# Altium PCB AudioMonitor_PCB.PcbDoc
Units mm, origin at the board's own origin, x right, y up, seen from the top; angles counter-clockwise.
Board outline 40.25 x 52.75 mm, 2 copper layers (Top Layer, Bottom Layer); 33 components, 18 nets, 74 pads, 12 vias.
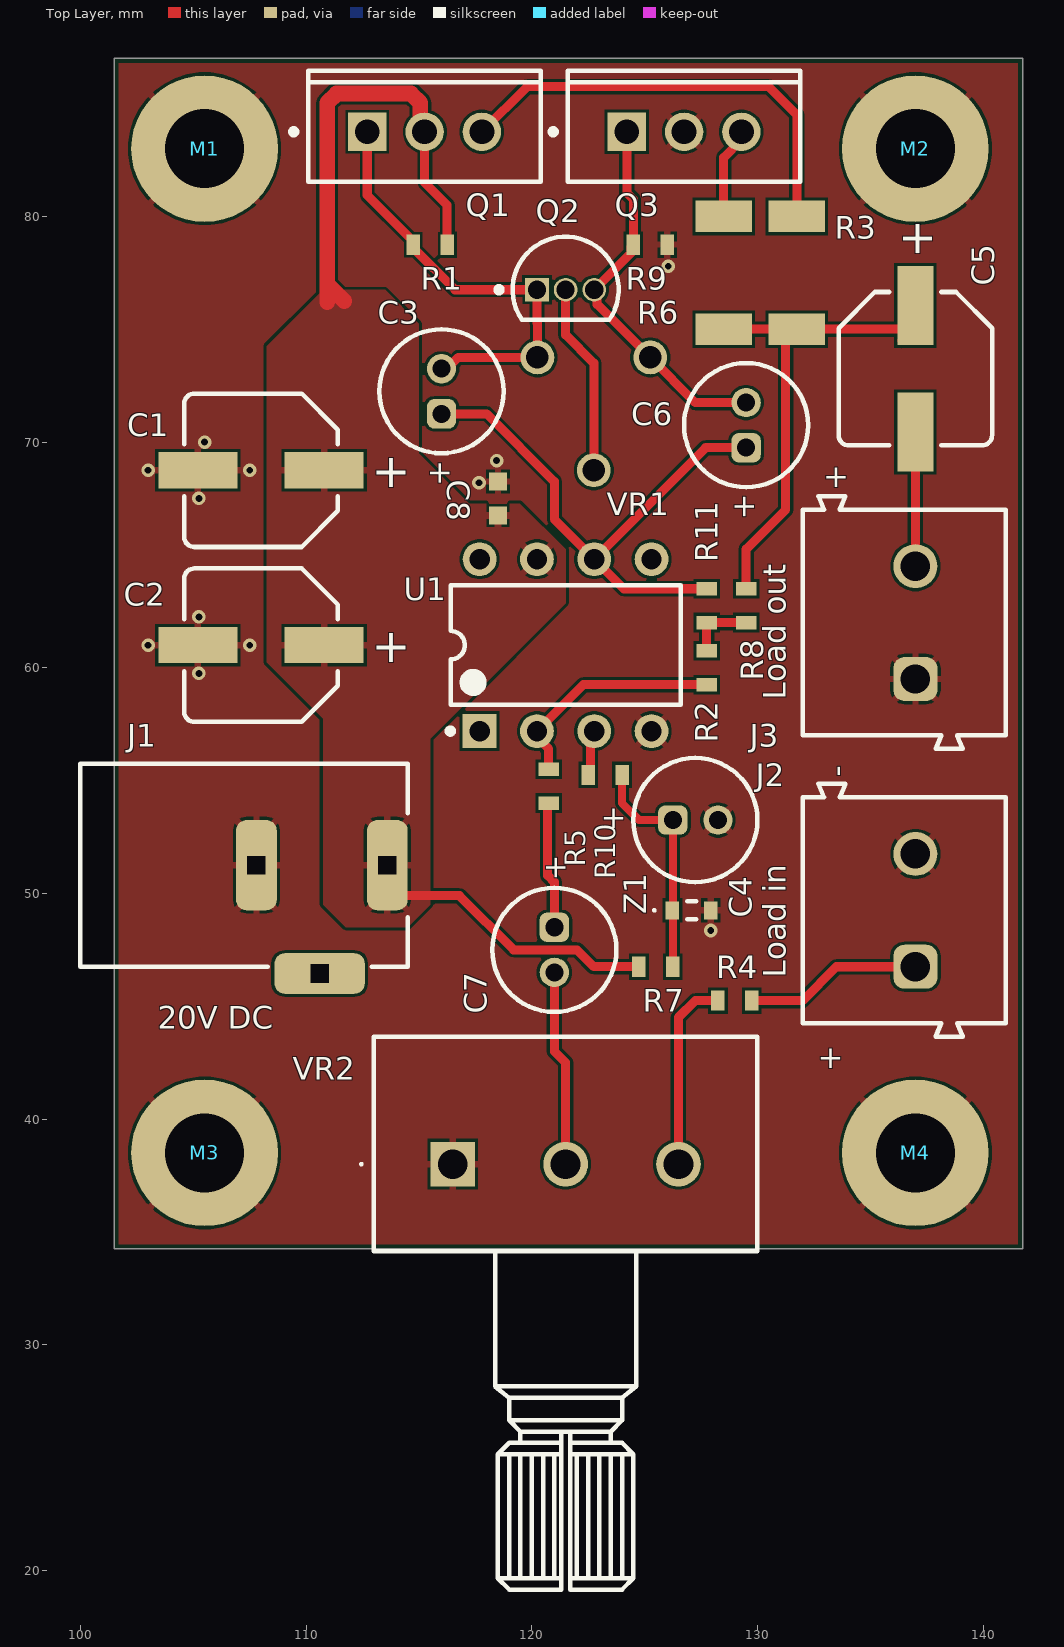
[diagram p0: Top Layer view]
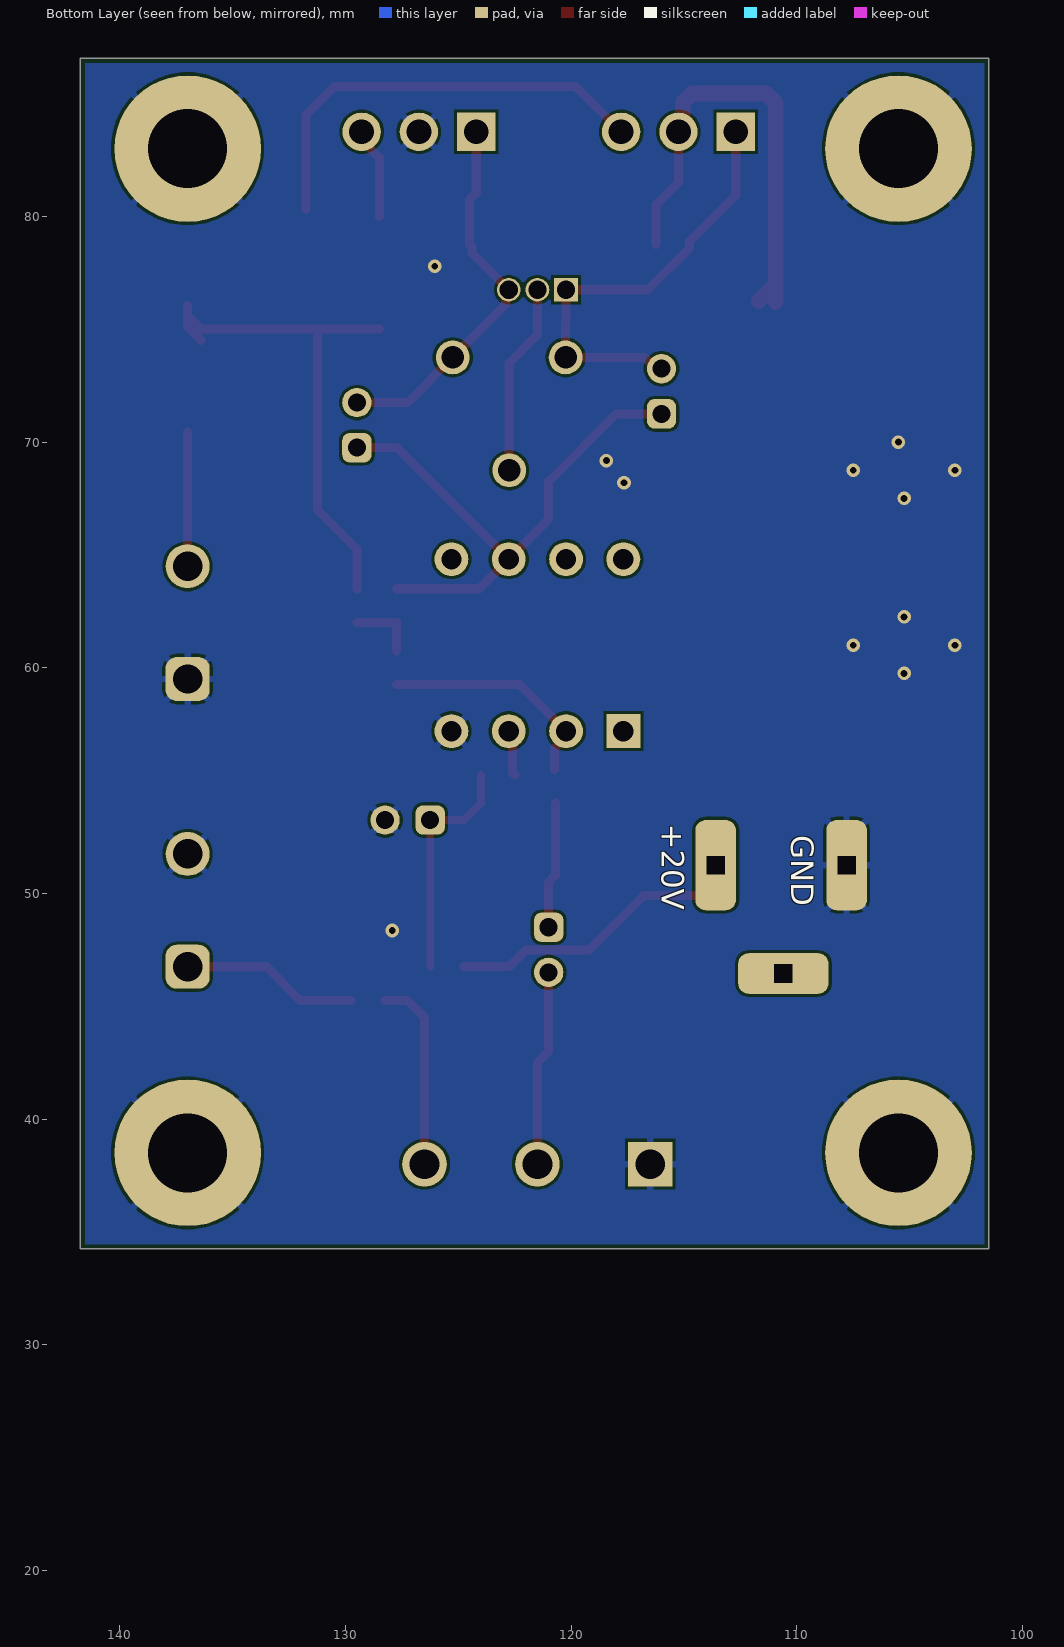
[diagram p1: Bottom Layer view, seen from below]
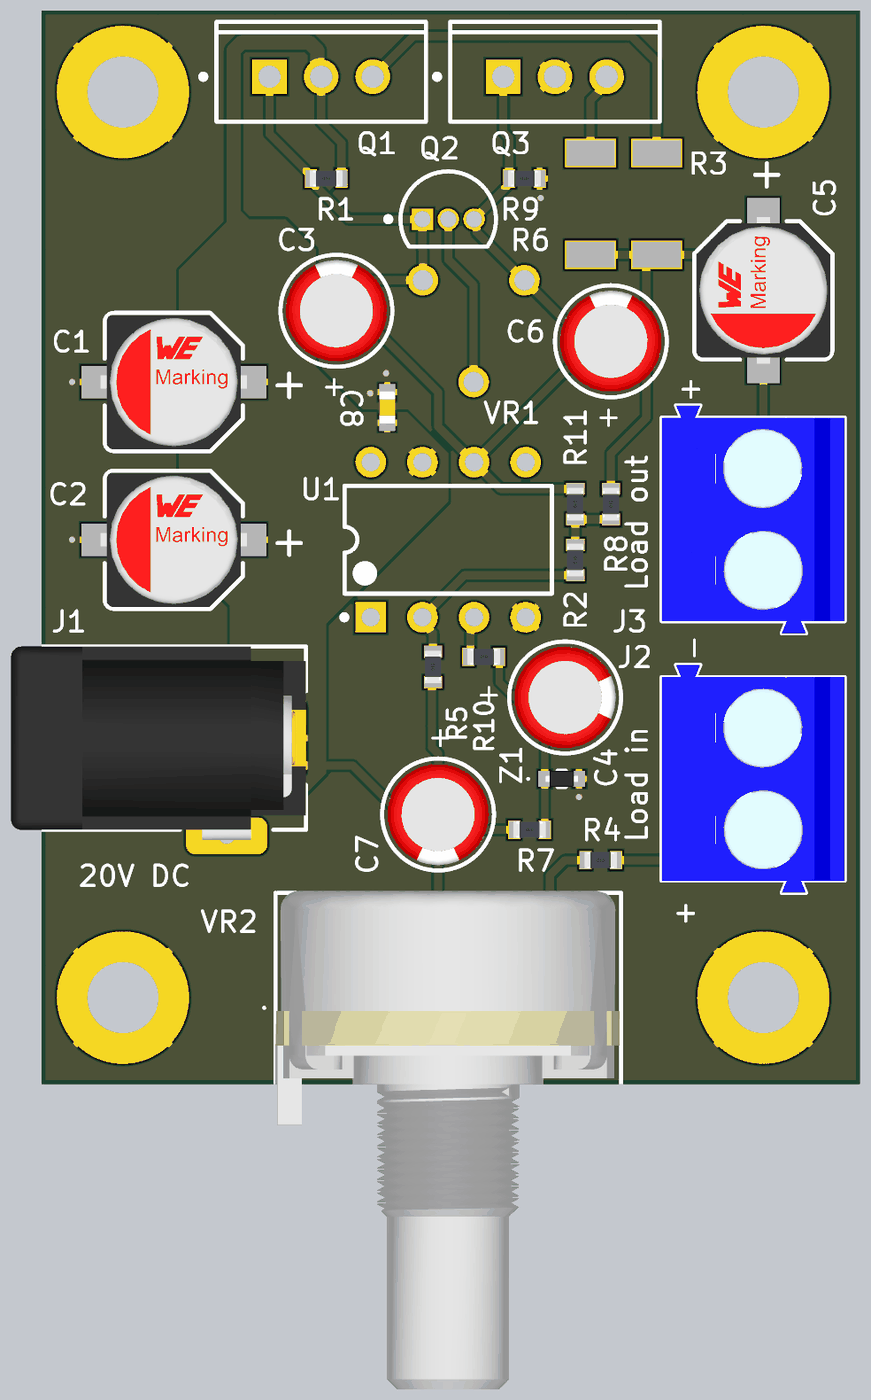
[diagram p2: 3D render of the assembled board from above, using the file's embedded part models]

## Layer stack, top to bottom
Top Solder: solder mask 0.0102, Solder Resist, Dk 3.5
Top Layer: signal copper 0.0356
Dielectric 1: dielectric 0.32, FR-4, Dk 4.8
Bottom Layer: signal copper 0.0356
Bottom Solder: solder mask 0.0102, Solder Resist, Dk 3.5

## Board outline
101.5,34.25 101.5,87 141.75,87 141.75,34.25

## Design rules (kind name [scope] priority, off if disabled: settings)
BoardOutlineClearance [All] p1: gap=0.2 ignorepadtopadclearanceinfootprint=FALSE
Clearance [All] p1: gap=0.127 ignorepadtopadclearanceinfootprint=FALSE except(0.2: Arc-Hole Track-Hole SMDPad-Hole THPad-Hole Via-Hole Fill-Hole Poly-Hole Region-Hole Text-Hole)
ComponentClearance [All] p1: gap=0.127 collisioncheckmode=3 verticalgap=0.127 showdistances=TRUE
DiffPairsRouting [All] p1: maxlimit=0.254 minlimit=0.127 mostfreqgap=0.127 toplayer_minwidth=0.127 toplayer_maxwidth=25.4 toplayer_prefwidth=0.127 bottomlayer_minwidth=0.127 bottomlayer_maxwidth=25.4 bottomlayer_prefwidth=0.127 maxuncoupledlength=12.7
Height [All] p1: minheight=0 maxheight=1816.048 prefheight=12.7
HoleSize [All] p1: absolutevalues=TRUE maxlimit=6.3 minlimit=0.15 maxpercent=80.000 minpercent=20.000
HoleToHoleClearance [All] p1: gap=0.25 allowstackedmicrovias=FALSE
MinimumAnnularRing [All] p1: minimumring=0.075
MinimumSolderMaskSliver [All] p1: minsoldermaskwidth=0
PlaneClearance [All] p1: clearance=0.127
PlaneConnect PlaneConnectPowerPads [InPadClass('PowerPads')] p1: planeconnectstyle=Direct reliefexpansion=0.508 reliefentries=4 reliefconductorwidth=0.254 reliefairgap=0.254
PlaneConnect [All] p2: pad.planeconnectstyle=Relief pad.reliefexpansion=0.3 pad.reliefentries=4 pad.reliefconductorwidth=0.127 pad.reliefairgap=0.127 via.planeconnectstyle=Direct via.reliefexpansion=0.3 via.reliefentries=4 via.reliefconductorwidth=0.127 via.reliefairgap=0.127
PolygonConnect PolygonConnectPowerPads [All vs (InPadClass('PowerPads'))] p1: connectstyle=Direct reliefconductorwidth=0.254 reliefentries=4 polygonreliefangle="90 Angle" airgapwidth=0.254
PolygonConnect [All] p2: thpad.connectstyle=Relief thpad.reliefconductorwidth=0.3 thpad.reliefentries=4 thpad.polygonreliefangle="90 Angle" thpad.airgapwidth=0.127 thpad.conductorbypadedge=TRUE thpad.mindistance=0.381 thpad.enablemindistance=FALSE smdpad.connectstyle=Relief smdpad.reliefconductorwidth=0.3 smdpad.reliefentries=4 smdpad.polygonreliefangle="90 Angle" smdpad.airgapwidth=0.127 smdpad.conductorbypadedge=TRUE smdpad.mindistance=0.381 smdpad.enablemindistance=FALSE via.connectstyle=Direct via.reliefconductorwidth=0.127 via.reliefentries=4 via.polygonreliefangle="90 Angle" via.airgapwidth=0.127
RoutingVias [All] p1: holewidth=0.3 width=0.6 viastyle="Through Hole" minholewidth=0.3 minwidth=0.6 maxholewidth=0.6 maxwidth=6.6
SilkToSilkClearance [All] p1: silktosilkclearance=0
SilkToSolderMaskClearance [IsPad] p1: minsilkscreentomaskgap=0.127 clearancetoexposedcopper=TRUE
SolderMaskExpansion SolderMaskExpansionVia [isVia] p1: expansion=0.102 istentingtop=TRUE
SolderMaskExpansion [All] p2: expansion=0.075 istentingtop=FALSE useseparateexpansions=TRUE expansionbottom=0.075 istentingbottom=FALSE
SupplyNets "Schematic Supply Nets_1" [InNet('+VBIAS')] p1: voltage=0.000
SupplyNets "Schematic Supply Nets" [InNet('+20')] p2: voltage=0.000
SupplyNets "Schematic Supply Nets_4" [InNet('GND')] p3: voltage=0.000
Width [All] p1: maxlimit=25.4 minlimit=0.127 preferedwidth=0.127 minimp=50.000000 maximp=50.000000 favimp=50.000000
20 further rules are at their usual default settings.

## Components (designator, comment, footprint, x,y, rotation, side; value= is the part's Value field where it differs from the comment)
C1 "ROQANG RVT1V101M0607" "Wurth D6.3x7.7mm" 108,68.75 r0 top value="100uF 35V"
C2 "ROQANG RVT1V101M0607" "Wurth D6.3x7.7mm" 108,61 r0 top value="100uF 35V"
C3 "AISHI CE-10/50PHT-Y" "WURTH THT CAP D5H11 P2mm" 116,72.25 r270 top
C4 "AISHI CE-10/50PHT-Y" "WURTH THT CAP D5H11 P2mm" 127.25,53.25 r180 top
C5 "ROQANG RVT1V101M0607" "Wurth D6.3x7.7mm" 137,73.25 r90 top value="100uF 35V"
C6 "AISHI CE-10/50PHT-Y" "WURTH THT CAP D5H11 P2mm" 129.5,70.75 r270 top
C7 "AISHI CE-10/50PHT-Y" "WURTH THT CAP D5H11 P2mm" 121,47.5 r90 top
C8 "Capacitor 100nF 0603 50V" "Wurth 0603 capacitor" 118.5,67.5 r90 top value=100nF
J1 "694108301002" 694108301002 107.25,51.25 r270 top
J2 "691101710002" "Wurth 2 pin 5mm screw terminal" 136.5,49.25 r90 top
J3 "691101710002" "Wurth 2 pin 5mm screw terminal" 136.5,62 r90 top
M1 "Mounting hole" "M3 hole"#1 105.5,83.75 r0 top
M2 "Mounting hole" "M3 hole"#2 137,82.75 r0 top
M3 "Mounting hole" "M3 hole"#3 105.25,38.5 r0 top
M4 "Mounting hole" "M3 hole"#4 136.5,38.75 r0 top
Q1 "MJE3055TG" ONSC-TO-220-3-221A-09 115.25,83.75 r90 top
Q2 "BC547B" ONSC-TO-92-3-29-11 121.5,76.75 r0 top
Q3 "MJE2955TG" ONSC-TO-220-3-221A-09 126.75,83.75 r90 top
R1 "Resistor 10k 0603" "Wurth 0603 Resistor" 115.5,78.75 r0 top value=10k
R2 "Resistor 100k 0603" "Wurth 0603 Resistor" 127.75,60 r90 top value=100k
R3 "Resistor 220m 2010" "Viking 2010 Resistor" 131.75,77.5 r90 top value=220m
R4 "Resistor 100k 0603" "Wurth 0603 Resistor" 129,45.25 r180 top value=100k
R5 "Resistor 100k 0603" "Wurth 0603 Resistor" 120.75,54.75 r90 top value=100k
R6 "Resistor 220m 2010" "Viking 2010 Resistor" 128.5,77.5 r270 top value=220m
R7 "Resistor 2k2 0603" "Wurth 0603 Resistor" 125.5,46.75 r180 top value=2k2
R8 "Resistor 0R 0603" "Wurth 0603 Resistor" 129.5,62.75 r90 top value=0R
R9 "Resistor 10k 0603" "Wurth 0603 Resistor" 125.25,78.75 r180 top value=10k
R10 "Resistor 100k 0603" "Wurth 0603 Resistor" 123.25,55.25 r0 top value=100k
R11 "Resistor 0R 0603" "Wurth 0603 Resistor" 127.75,62.75 r270 top value=0R
U1 "TL081CP" P0008A 121.5,61 r90 top
VR1 "RKT6V-5K" "SRpassives RKT6V-5K" 122.75,68.75 r180 top value=5k
VR2 "100k" PDB181K215P503B 116.5,38 r0 top
Z1 "10V" BZT52C10TTP 127.083,49.25 r0 top

## Footprints (in the part's own frame and the unit in brackets; to place one, negate y for a bottom-side part, rotate by r counter-clockwise, add the part's x,y. Pads: shape width x height; smd on the part's side, far side on the other; paste and mask are expansions set on the pad)
694108301002 [mm] "DC Power Jack Right Angled(6.4)"
  rrect50% 4x1.8 hole 0.8 square: 1(0,6.35) 2(0,0.55)
  rrect50% 1.8x4 hole 0.8 square: 3(4.8,3.35)
  silkscreen extent -4.5,-7.25 4.5,7.25, body extent -4.5,-7.25 5,7.25, height 10.75
BZT52C10TTP [mm]
  rect 0.6x0.8 smd: 1(-0.85,0) 2(0.85,0)
  silkscreen extent -1.7,-0.4 0.2,0.4, body extent -0.8,-0.4 0.8,0.4, height 0.57
"M3 hole"#1 [mm]
  round 6.5 hole 3.5: 1(0,-0.75)
"M3 hole"#2 [mm]
  round 6.5 hole 3.5: 1(0,0.25)
"M3 hole"#3 [mm]
  round 6.5 hole 3.5: 1(0.25,0)
"M3 hole"#4 [mm]
  round 6.5 hole 3.5: 1(0.5,-0.25)
ONSC-TO-92-3-29-11 [mm] "TO, 3-Leads, Body Dia 4.7mm, Pitch 1.27mm"
  rect 1.05x1.05 hole 0.8: 1(-1.27,0)
  round 1.05 hole 0.8: 2(0,0) 3(1.27,0)
  silkscreen extent -3.07,-1.34 2.35,2.35, body extent -2.35,-1.33 2.36,2.36, height 7.87
ONSC-TO-220-3-221A-09 [mm] "FM, 3-Leads, Body 10.3x4.85mm, Pitch 2.54mm"
  rect 1.7x1.7 hole 1.1: 1(0,2.54)
  round 1.7 hole 1.1: 2(0,0) 3(0,-2.54)
  silkscreen extent -2.2,-5.15 2.7,5.92, body extent -2.18,-5.15 2.67,5.15, height 19.85
P0008A [mm] "DIP, 8-Leads, Body 10.15x6.6mm, Pitch 2.54mm"
  rect 1.5x1.5 hole 0.9: 1(-3.81,3.81)
  round 1.5 hole 0.9: 2(-3.81,1.27) 3(-3.81,-1.27) 4(-3.81,-3.81) 5(3.81,-3.81) 6(3.81,-1.27) 7(3.81,1.27) 8(3.81,3.81)
  silkscreen extent -3.93,-5.1 2.65,5.23, body extent -3.95,-5.07 3.95,5.07, height 5.08
PDB181K215P503B [mm]
  rect 1.98x1.98 hole 1.32: 1(0,0)
  round 1.98 hole 1.32: 2(5,0) 3(10,0)
  silkscreen extent -4.1,-18.85 13.5,5.65, body extent -3.51,-18.75 13.49,5.75, height 22.17
"SRpassives RKT6V-5K" [mm]
  round 1.5 hole 1: 1(-2.5,-5) 2(0,0) 3(2.5,-5)
"Viking 2010 Resistor" [mm] "Fixed Thick Film, body 5 x 2.5 mm"
  rect 1.4x2.5 smd paste-0.07 mask+0.1: 1(-2.5,0) 2(2.5,0)
"Wurth 2 pin 5mm screw terminal" [mm] "5,00mm - modular - blue - Horizontal entry with pressure clamp - 12,6mm height - 02p"
  rrect50% 1.95x1.95 hole 1.3: 1(-2.5,-0.5)
  round 1.95 hole 1.3: 2(2.5,-0.5)
  silkscreen extent -5.6,-4.5 5.6,4.5, body extent -5.6,-4.5 5.6,4.5, height 12.65
"Wurth 0603 capacitor" [mm] "Ceramic Capacitors, body 1.6x0.8mm"
  rect 0.8x0.8 smd: 1(-0.75,0) 2(0.75,0)
  body extent -0.8,-0.4 0.8,0.4, height 0.8
"Wurth 0603 Resistor" [mm] "Fixed Thick Film, body 1.60 x 0.80 mm"
  rect 0.6x0.9 smd paste-0.028 mask+0.1: 1(-0.75,0) 2(0.75,0)
  body extent -0.8,-0.4 0.8,0.4, height 0.45
"Wurth D6.3x7.7mm" [mm] "Aluminum Hybrid Polymer Capacitor, SMT, body diameter 6.3mm"
  rect 3.5x1.6 smd: 1(2.8,0) 2(-2.8,0)
  silkscreen extent -3.4,-3.4 3.4,3.4, body extent -3.6,-3.3 3.6,3.3, height 7.75
"WURTH THT CAP D5H11 P2mm" [mm] "Aluminum Electrolytic Capacitors, 5x11mm"
  rrect50% 1.3x1.3 hole 0.8: 1(1,0)
  round 1.3 hole 0.8: 2(-1,0)
  silkscreen extent -2.75,-2.75 2.75,2.75, body extent -2.49,-2.5 2.5,2.5, height 11.31

## Part data
C1 C2 C5: library part "100uF 35V SMD", "SMD,D6.3xL7.7mm"
C3 C4 C6 C7: library part "10uF 50V THT", "Aluminum Electrolytic Capacitor, Radial, THT, D5 x H11mm, 10uF, 50V", Capacitance="10uF 50V", Capacitance Tolerance=+/-20%, Leakage Current=5uA, Manufacturer="Wurth Elektronik", Manufacturer Part Number=860010672009, Operating Temperature Max=85°C, Operating Temperature Min=-40°C, Rated Voltage (DC)=50V, Ripple Current=72mA, Category="Aluminum Electrolytic Capacitors", ComponentLink1Description="Website Link", ComponentLink1URL=https://www.we-online.com/redexpert/article/860010672009?ad, ComponentLink2Description="Datasheet Link", ComponentLink2URL=https://www.we-online.com/redexpert/spec/860010672009?ad, Diameter=5mm, Dissipation Factor=10%, Endurance=2000h, Height=11mm, Match Code=WCAP-ATG8, Mount="Through Hole", Packaging="Ammo Pack", Technical Reference=ATBC110100M050DSPA3B000
J1: library part CMP-1502-00190-4, "DC Power Jack Connector WR-DC, Male, Right Angled, THT, 5 A, 24 V", Color=Black, Current Rating=5A, Flammability Rating="UL94 V-0", Insulation Resistance=100MΩ, Max Operating Temperature=85°C, Min Operating Temperature=-40°C, Operating Supply Voltage=24V, Voltage Rating=30V, Connector Type=Power, Contact Gender=Female, Contact Material="Gold, Tin", Contact Plating=Tin, Gender=Male, Height=11mm, Housing Material=Polyamide, Mount="Through Hole", Number of Contacts=3, Packaging=Bulk, REACH SVHC=Unknown, RoHS=Compliant, Shielding=Unshielded, Termination="Through Hole"
J2 J3: library part "2 pin 5mm screw terminal", "WR-TBL Series 101 Horizontal Entry Modular, THT, pitch 5mm, 02p", Manufacturer="Wurth Elektronik", Operating Temperature Max=105degC, Operating Temperature Min=-40degC, Rated Current=16A, Working Voltage="250V (AC)", Application="Pressure Clamp", ComponentLink1Description="Website Link", ComponentLink1URL=https://www.we-online.com, ComponentLink2Description="Datasheet Link", ComponentLink2URL=https://www.we-online.com/components/products/datasheet/691101710002, Lead Pitch=5mm, Manufacturer Part Number=691101710002, Modularity=Yes, Mount="Through Hole", Number of Pins=2, Number of Rows=1, Orientation=Horizontal, Packaging=Box, Product Series=WR-TBL, Wire Section="26 to 14 (AWG) 0.5 to 2.5 (mm^2)"
Q1: library part CMP-1048-00035-1, "Complementary Silicon Plastic Power Transistor, 3-Pin TO-220, Pb-Free, Tube", Manufacturer="On Semiconductor", ComponentLink1Description="Manufacturer URL", ComponentLink1URL=http://www.onsemi.com/, ComponentLink2Description=Datasheet, ComponentLink2URL=http://www.onsemi.com/pub_link/Collateral/MJE2955T-D.PDF, ComponentLink3Description="Package Specification", ComponentLink3URL=http://www.onsemi.com/pub_link/Collateral/221A-09.PDF, DatasheetVersion="Rev. 11", fT Min (MHz)=2, IC Continuous (A)=10, Mounting Technology="Through Hole", PackageDescription="3-Pin Flange Mount, Vertical Straight Lead, Body 9.97 x 4.445 mm, Pitch 2.54 mm", PackageReference=TO-220-3-221A-09, PackageVersion="Rev. AG, 09/2011", Packing=Tube, PartNumber=MJE3055TG, Polarity=NPN, RoHS=TRUE
Q2: library part CMP-1048-01467-1, "Amplifier Transistor, NPN Silicon, 3-Pin TO-92, Bulk Box", Manufacturer="On Semiconductor", ComponentLink1Description="Manufacturer URL", ComponentLink1URL=http://www.onsemi.com/, ComponentLink2Description=Datasheet, ComponentLink2URL=http://www.onsemi.com/pub_link/Collateral/BC546-D.PDF, ComponentLink3Description="Package Specification", ComponentLink3URL=http://www.onsemi.cn/pub_link/Collateral/2N6426-D.PDF, DatasheetVersion="Rev. 7", fT Min (MHz)=150, IC Continuous (A)=0.1, Mounting Technology="Through Hole", PackageDescription="3-Pin Transistor Outline, Body 4.825 x 3.685 mm, Pitch 1.27 mm", PackageReference=TO-92-3-29-11_AM_SL, PackageVersion="Rev. AM", Packing="Bulk Box", PartNumber=BC547B, Polarity=NPN, RoHS=FALSE
Q3: library part CMP-1048-01153-1, "Complementary Silicon Plastic Power Transistor, 3-Pin TO-220, Pb-Free, Tube", Manufacturer="On Semiconductor", ComponentLink1Description="Manufacturer URL", ComponentLink1URL=http://www.onsemi.com/, ComponentLink2Description=Datasheet, ComponentLink2URL=http://www.onsemi.com/pub_link/Collateral/MJE2955T-D.PDF, ComponentLink3Description="Package Specification", ComponentLink3URL=http://www.onsemi.com/pub_link/Collateral/221A-09.PDF, DatasheetVersion="Rev. 11", fT Min (MHz)=2, IC Continuous (A)=10, Mounting Technology="Through Hole", PackageDescription="3-Pin Flange Mount, Vertical Straight Lead, Body 9.97 x 4.445 mm, Pitch 2.54 mm", PackageReference=TO-220-3-221A-09, PackageVersion="Rev. AG, 09/2011", Packing=Tube, PartNumber=MJE2955TG, Polarity=PNP, RoHS=TRUE
U1: library part CMP-0017-00937-2, "JFET-Input Operational Amplifier, 7 to 36 V, 0 to 70 degC, 8-pin DIP (P8), Pb-Free (RoHS)", Manufacturer="Texas Instruments", Rating=Military, Total Supply Voltage(Max)(+5V is 5, +/-5V is 10)=36, Total Supply Voltage(Min)(+5V is 5, +/-5V is 10)=7, CMRR(Min)(dB)=70, Code_JEDEC=MS-001, ComponentLink1Description="Manufacturer URL", ComponentLink1URL=http://www.ti.com/, ComponentLink2Description=Datasheet, ComponentLink2URL=http://www.ti.com/lit/ds/symlink/tl081.pdf, ComponentLink3Description="Package Specification", ComponentLink3URL=http://www.ti.com/litv/pdf/mpdi001b, DatasheetVersion=SLOS081G, Eco-Plan="Pb-Free (RoHS)", GBW(Typ)(MHz)=3, IIB(Max)(pA)=400, Iq per channel(Max)(mA)=2.8, Mounting Technology="Through Hole", Number of Channels=1, Offset Drift(Typ)(uV/C)=18, PackageDescription="8-Pin Plastic In-Line, Body 9.59 x 6.35 mm, Pitch 2.54 mm", PackageReference=P0008A, PackageVersion="4040082/E, 04/2010", PartNumber=TL081CP, Slew Rate(Typ)(V/us)=13, Sub Family="General Purpose Amplifier, High Supply Voltage Amplifier (>=30V)", Vio (25C)(Max)(mV)=15, Vn at 1kHz(Typ)(nV/rtHz)=18
VR1: library part "5k THT trimmer"
VR2: library part PDB181-K215P-503B, "Variable Resistor", Manufacturer_Name=Bourns, Mouser Part Number=652-PDB181K215P503B, Datasheet Link=https://www.digikey.in/en/products/detail/bourns-inc/PDB181-K215P-503B/4699117, Height=21mm, Manufacturer_Part_Number=PDB181-K215P-503B, Mouser Price/Stock=https://www.mouser.co.uk/ProductDetail/Bourns/PDB181-K215P-503B?qs=Zq5ylnUbLm4zTjfFsN3naw%3D%3D
Z1: library part BZT52C10T-TP, "Zener Diode", Manufacturer_Name=MCC, Mouser Part Number=833-BZT52C10T-TP, Arrow Part Number=BZT52C10T-TP, Arrow Price/Stock=https://www.arrow.com/en/products/bzt52c10t-tp_1/micro-commercial-components.html?utm_currency=USD&region=nac, Datasheet Link=https://www.mccsemi.com/pdf/Products/BZT52C(B)2V4T-BZT52C(B)39T(SOD-523).pdf, Height=0.65mm, Manufacturer_Part_Number=BZT52C10T-TP, Mouser Price/Stock=https://www.mouser.com/Search/Refine.aspx?Keyword=833-BZT52C10T-TP

## Via types
v1: diameter 0.6, hole 0.3, Top Layer to Bottom Layer, tented both sides, 12 vias

## Nets (pads, with @x,y where several pads share a name; then routed paths per layer and width w, separated by ;. In a path a pad name is that pad's centre, name@x,y a point inside that pad or via, vN(x,y) a via of type N, cw(c..) or ccw(c..) an arc to the next point about the centre after c; other vN are vias at no path point)
+20: C1.1 C2.1 C8.1 J1.1 Q1.2 R1.2 R7.2 U1.7 | length 34.5
  Top Layer w0.4: J1.1 113.6,50.581 114.281,49.9 116.793,49.9 119.193,47.5 122,47.5 122.75,46.75 R7.2 ; Q1.2 115.25,81.5 116.25,80.5 R1.2
  Top Layer w0.7: 110.941,76.191 110.941,77 ; 111.691,76.25 110.941,77 ; Q1.2 115.059,83.941 115.059,85.031 114.649,85.441 111.351,85.441 110.941,85.031 110.941,77
+VBIAS: R10.1 U1.3 | length 2.1
  Top Layer w0.4: R10.1 122.6,55.35 122.6,57.02 U1.3
GND: C1.2 C2.2 C4.2 C8.2 J1.2 J2.2 J3.1 M1.1 M2.1 M3.1 M4.1 Q3.2 R9.1 U1.4 VR2.1 Z1.2
  other v1: 127.932,48.355 105.25,59.75 103,61 107.5,61 105.25,62.25 105.25,67.5 117.663,68.201 103,68.75 107.5,68.75 118.443,69.181 105.5,70 126.048,77.792
NetC3_1: C3.1 C6.1 R11.1 U1.6 | length 24.7
  Top Layer w0.4: C3.1 118,71.25 121,68.25 121,66.58 U1.6 ; R11.1 124.08,63.5 U1.6 ; C6.1 127.71,69.75 U1.6
NetC3_2: C3.2 Q1.1 Q2.1 R1.1 VR1.3 | length 19.7
  Top Layer w0.4: Q1.1 112.71,80.94 114.75,78.9 R1.1 114.75,78.6 116.6,76.75 Q2.1 120.23,75.27 120.25,75.25 VR1.3 116.744,73.75 116.244,73.25 C3.2
NetC4_1: C4.1 R7.1 R10.2 Z1.1 | length 10.3
  Top Layer w0.35: R10.2 124,54 124.75,53.25 C4.1 R7.1
NetC5_1: C5.1 R3.1 R6.2 R8.2 | length 22.8
  Top Layer w0.4: R6.2 R3.1@131.25,75 ; R8.2 129.5,65.25 131.25,67 R3.1@131.25,75 ; C5.1@136.4,74.5 137,75.1 C5.1@137,75.6 ; C5.1 C5.1@137,75.6 ; R3.1@131.25,75 R3.1 136.4,75 C5.1@137,75.6
NetC5_2: C5.2 J3.2 | length 6
  Top Layer w0.4: J3.2 C5.2
NetC6_2: C6.2 Q2.3 Q3.1 R9.2 VR1.1 | length 17.2
  Top Layer w0.4: Q3.1 124.21,81.04 124.5,80.75 R9.2 124.4,78.65 124.4,78.38 Q2.3 122.894,76.626 122.894,76.106 VR1.1 127.25,71.75 129.2,71.75 C6.2 ; C6.2@129.2,71.7 C6.2@129.5,71.7
NetC7_1: C7.1 R5.1 | length 5.6
  Top Layer w0.4: R5.1@120.7,54 120.7,50.8 121,50.5 C7.1
NetC7_2: C7.2 VR2.2 | length 8.7
  Top Layer w0.4: C7.2 121,43 121.5,42.5 VR2.2
NetJ2_1: J2.1 R4.1 | length 7.9
  Top Layer w0.4: R4.1 132,45.25 133.5,46.75 J2.1
NetQ1_3: Q1.3 R3.2 | length 19.5
  Top Layer w0.4: Q1.3 119.79,85.75 130.5,85.75 131.75,84.5 R3.2@131.75,80.303
NetQ2_2: Q2.2 VR1.2 | length 8.5
  Top Layer w0.4: Q2.2 121.5,74.75 122.75,73.5 VR1.2
NetQ3_3: Q3.3 R6.1 | length 4.1
  Top Layer w0.4: R6.1 128.5,82.608 129.29,83.398 Q3.3
NetR2_1: R2.1 R5.2 U1.2 | length 10.3
  Top Layer w0.4: R5.2 120.75,56.4 120.23,56.92 U1.2 122.29,59.25 R2.1
NetR2_2: R2.2 R8.1 R11.2 | length 3
  Top Layer w0.4: R2.2 R11.2 R8.1
NetR4_2: R4.2 VR2.3 | length 8.6
  Top Layer w0.4: VR2.3 126.5,44.5 127.25,45.25 R4.2
pads on no net: J1.3 U1.1 U1.5 U1.8

## Polygon pours and split planes (outlines as drawn)
GND on Top Layer "NONET_L-01_P-001" (solid, pour order 2): 101.5,34.25 101.5,87 141.75,87 141.75,34.25
+20 on Top Layer "NONET_L-01_P-001" (solid, pour order 1): 111.75,48.5 110.75,49.5 110.75,57.75 108.25,60.25 108.25,74.25 110.75,76.75 113.5,76.75 115,75.25 115,69.5 117.223,67.277 119.473,67.277 121.5,65.25 121.5,62.856 115.5,56.856 115.5,49.5 114.5,48.5
GND on Bottom Layer "NONET_L-01_P-001" (solid, pour order 0): 101.5,34.25 101.5,87 141.75,87 141.75,34.25

## Silkscreen, mask and mechanical layers (free items; w line width, h text height)
Top Overlay:
  text "+" at 132.917,68 h1
  text "Load out" at 131.25,58.585 h1 r90
  text "-" at 134,55.167 h1 r90
  text "Load in" at 131.25,46.251 h1 r90
  text "20V DC" at 103.418,44 h1
  text "+" at 132.667,42.25 h1
Bottom Overlay:
  text "+20V" at 116,53.083 h1 r90
  text "GND" at 110.25,52.583 h1 r90
Mechanical 1:
  the board outline again, w0.1

## Dimensions
141.75,87 to 141.75,34.25 on Mechanical 11
101.5,87 to 141.75,87 on Mechanical 11

## Text inside footprints (layer, text, board x,y; h text height)
C1: Top Overlay "+" at 112.9,68 h1.5
C2: Top Overlay "+" at 112.9,60.25 h1.5
C3: Top Overlay "+" at 115.5,69.2 h1 r270
C4: Top Overlay "+" at 124.2,53.75 h1 r180
C5: Top Overlay "+" at 137.75,78.15 h1.5 r90
C6: Top Overlay "+" at 129,67.7 h1 r270
C7: Top Overlay "+" at 121.5,50.55 h1 r90